# Altium PCB 控制板.PcbDoc (part 1 of 2)
Units mil, origin at the board's own origin, x right, y up, seen from the top; angles counter-clockwise.
Board outline 5565.03 x 4140.03 mil, 2 copper layers (Top Layer, Bottom Layer); 115 components, 113 nets, 543 pads, 215 vias.
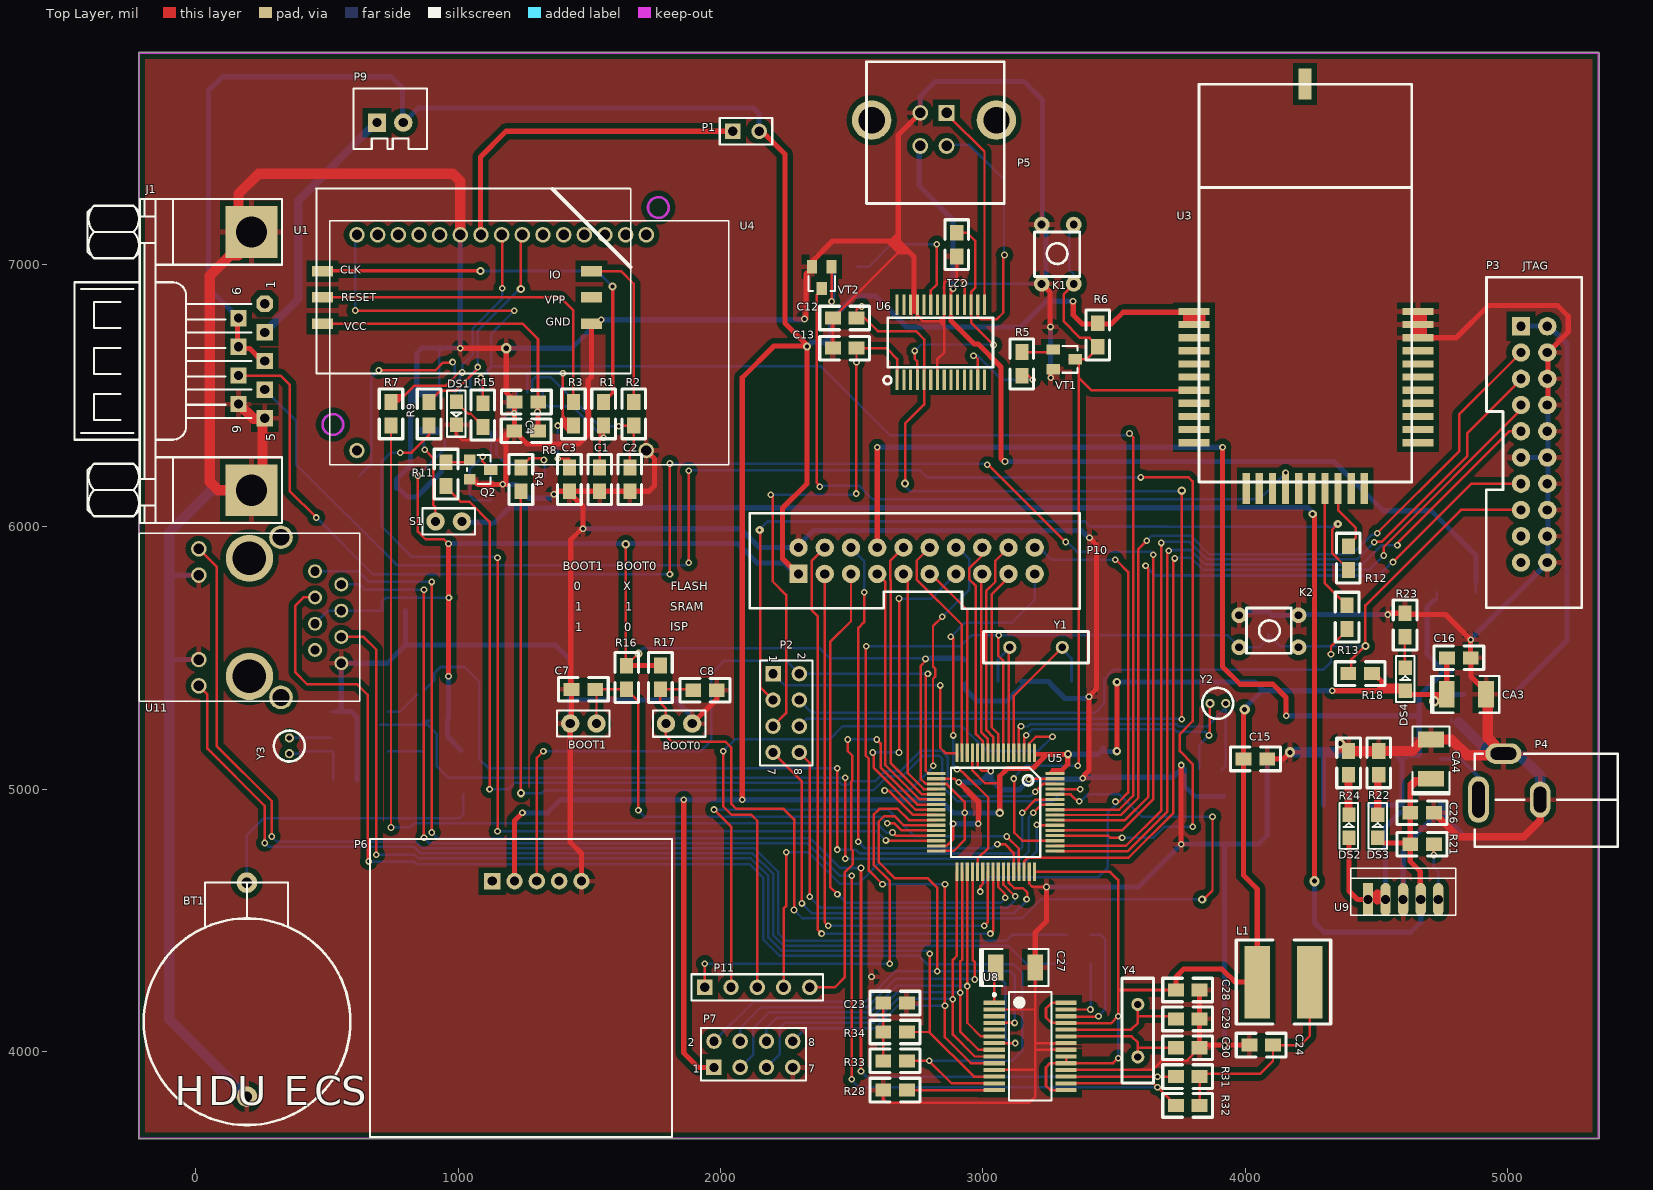
[diagram p0: Top Layer view]
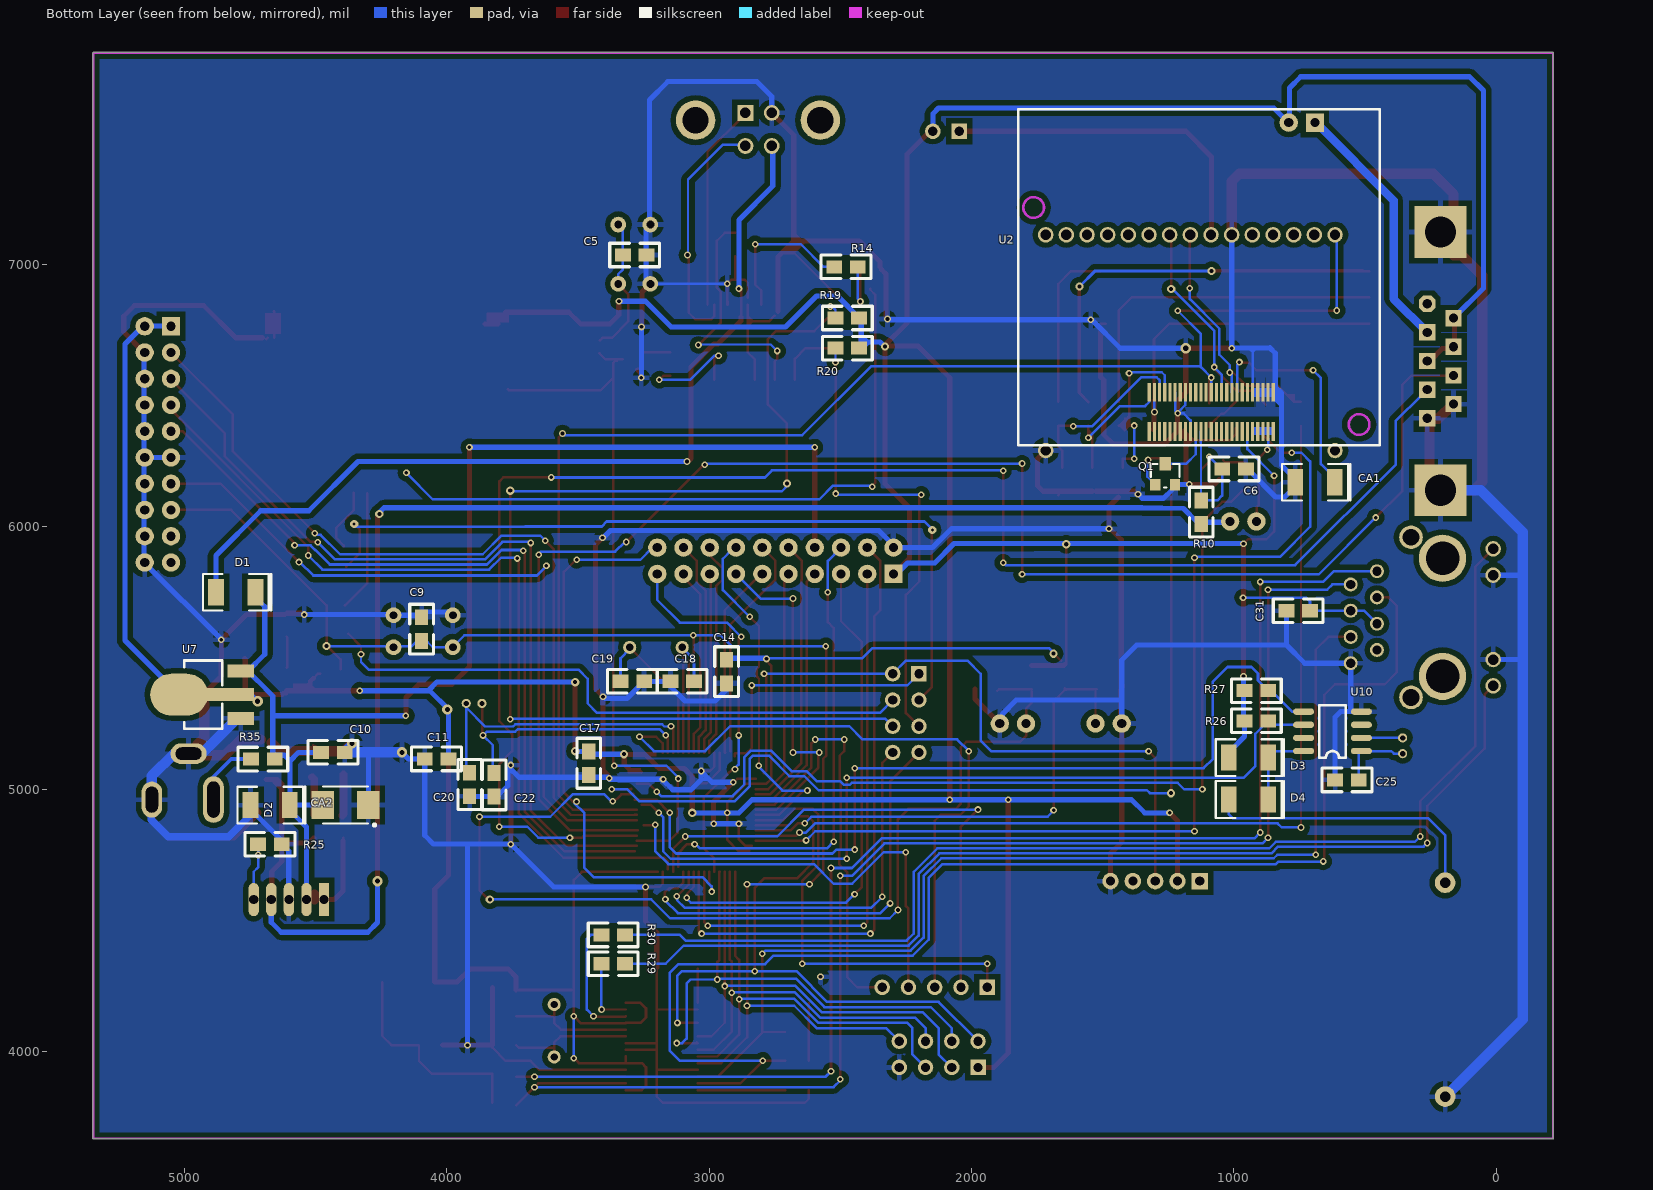
[diagram p1: Bottom Layer view, seen from below]

## Layer stack, top to bottom
Top Layer: signal copper 1.4
Dielectric: dielectric 12.6, FR-4, Dk 4.8
Bottom Layer: signal copper 1.4

## Board outline
-215,3667.48 cw(c-215,3670) -217.51,3670 -217.51,7805 cw(c-215,7805) -215,7807.52 5345,7807.52 cw(c5345,7805) 5347.52,7805 5347.52,3670 cw(c5345,3670) 5345,3667.48

## Design rules (kind name [scope] priority, off if disabled: settings)
Clearance Clearance_4 [InNet('GND0','U','V','W','R','S','T')] p1: gap=98.43
Clearance Clearance_3 [(InPolygon)] p2: gap=20
Clearance Clearance_2 [(InPadClass('All Pads') AND InComponent('U2','U5'))] p3: gap=7.87
Clearance Clearance_1 [InNet('SIM-GND','VCC','VDD3_3','VDD4')] p4: gap=10
Clearance [All] p5: gap=9.45
ComponentClearance [All] p1: gap=0 collisioncheckmode=3 verticalgap=0 showdistances=FALSE
FabricationTestPointUsage TestPointUsage [All] p1: valid=0 allowmultiple=FALSE
FabricationTestpoint Testpoint [All] p1: side=3 testpointundercomponent=TRUE minsize=40 maxsize=100 preferedsize=60 minholesize=0 maxholesize=40 preferedholesize=32 testpointgrid=1 allowsidetop=TRUE allowsidebottom=TRUE usegrid=TRUE gridtolerance=0.01
Height [All] p1: minheight=0 maxheight=2362.2 prefheight=500
HoleSize [All] p1: absolutevalues=TRUE maxlimit=314.96 minlimit=1 maxpercent=80.000 minpercent=20.000
HoleToHoleClearance [All] p1: gap=0 allowstackedmicrovias=TRUE
MinimumSolderMaskSliver [All] p1: minsoldermaskwidth=0
PolygonConnect PolygonConnect_1 [InNet('GND0')] p1: connectstyle=Relief reliefconductorwidth=78.74 reliefentries=4 polygonreliefangle="90 Angle"
PolygonConnect [InNet('GND')] p2: connectstyle=Relief reliefconductorwidth=19.68 reliefentries=4 polygonreliefangle="90 Angle"
RoutingVias [All] p1: holewidth=13.78 width=25.59 viastyle="Through Hole" minholewidth=11.81 minwidth=23.62 maxholewidth=157.48 maxwidth=393.7
SilkToSilkClearance [All] p1: silktosilkclearance=0
SilkscreenOverComponentPads [All] p1: minsilkscreentomaskgap=0
SolderMaskExpansion [All] p1: expansion=4
Width [All] p1: maxlimit=157.48 minlimit=9.45 preferedwidth=19.68
19 further rules are at their usual default settings.

## Components (designator, comment, footprint, x,y, rotation, side; value= is the part's Value field where it differs from the comment)
BOOT0 "SW-SPST" HEAD1*2 1892,5250 r180 top (schematic designator BOOT2)
BOOT1 "SW-SPST" HEAD1*2 1427.34,5250.54 r0 top
BT1 "3.6V" BT 195,4115 r0 top
C1 "33pF" C0805 1539.34,6235.54 r90 top
C2 "33pF" C0805 1654.34,6235.54 r90 top
C3 "33pF" C0805 1424.34,6235.54 r90 top
C4 "104" C0805 1315,6475 r0 top
C5 "0.1u" C0805 3338.04,7035.54 r0 bottom
C6 "104" C0805 1054.34,6220.54 r0 bottom
C7 "104" C0805 1532.34,5380.54 r0 top
C8 "104" C0805 1886,5377 r180 top
C9 "104" C0805 4095,5555 r270 bottom
C10 "104" C0805 4378,5140.54 r180 bottom
C11 "104" C0805 4093,5115.54 r0 bottom
C12 "101" C0805 2528.04,6795.54 r0 top
C13 "101" C0805 2528.04,6680.54 r0 top
C14 "104" C0805 2933,5393 r270 bottom
C15 "104" C0805 4093,5115.54 r0 top
C16 "104" C0805 4868,5500.54 r0 top
C17 "104" C0805 3458,5044 r270 bottom
C18 "Cap" C0805 3157.04,5411.54 r0 bottom
C19 "Cap" C0805 3347.04,5411.54 r0 bottom
C20 "Cap" C0805 3912,5073 r90 bottom
C21 "104" C0805 2900,7020 r270 top
C22 "Cap" C0805 3819,5072 r90 bottom
C23 "Cap Semi" C0805 2610,4185 r180 top
C24 "Cap Semi" C0805 4115,4025 r0 top
C25 "Cap Var" C0805 514.34,5035.54 r180 bottom
C26 "104" C0805 4728,4910.54 r0 top
C27 "Cap Pol3" 1210C 3050,4320 r0 top
C28 "Cap Semi" C0805 3835,4235 r0 top
C29 "Cap Semi" C0805 3835,4125 r0 top
C30 "Cap Semi" C0805 3835,4015 r0 top
C31 "Cap Semi" C0805 810,5680 r0 bottom
CA1 "220uf" 1210C 617,6170.54 r0 bottom
CA2 "10UF/16V" 1210C 4598,4940.54 r0 bottom
CA3 "4.7UF/16V" 1210C 4768,5360.54 r0 top
CA4 "10uf" 1210C 4708,5040.54 r90 top
D1 "IN4001" 1210D 4873,5750.54 r180 bottom
D2 "Diode 1N4007" 1SMB5913BT3-齐纳稳压二极管 4385,4940 r0 bottom
D3 "1N4001" 1210D 1014.34,5120.54 r180 bottom
D4 "1N4001" 1210D 1014.34,4960.54 r180 bottom
DS1 "LPG" LED0805 994.34,6475.54 r270 top
DS2 "VCC" LED0805 4393,4815.54 r90 top
DS3 "VCC4" LED0805 4503,4815.54 r90 top
DS4 "VCC3V3" LED0805 4608,5375.54 r90 top
J1 "D Connecter 9" "UART - Male" 53.75,6631.61 r90 top
K1 "KEY" KEY-DIP 3283.04,7040.54 r90 top
K2 "KEY" KEY-DIP 4091,5603.68 r0 top
L1 "Inductor" L0725 4145,4265 r180 top
P1 "Header 2" HDR1X2 2047,7507 r0 top
P2 "Header 4X2" HDR2X4 2200,5440 r270 top
P3 "Header 10X2" IDC-20 5050,6765 r270 top
P4 "DC-005" DC-005 5418,4780.54 r180 top
P5 "USB" USB-B-180d 2861,7576.98 r270 top
P6 "LR9548S" GPS-VK-162 1130,4650 r0 top
P7 "Header 4X2" HDR2X4 1975,3940 r0 top
P9 "Header 2" SIP-2B 691,7540 r0 top
P10 "Header 10X2" IDC-20 2296.04,5820.54 r0 top
P11 "Header 5" HDR1X5 1940,4245 r0 top
Q1 "2N3904" NPN-SOT23 1224.34,6160.54 r180 bottom
Q2 "2N3904" NPN-SOT23 1044.34,6180.54 r270 top
R1 "33" R0805 1554.34,6375.54 r270 top
R2 "33" R0805 1669.34,6375.54 r270 top
R3 "33" R0805 1439.34,6375.54 r270 top
R4 "Res2" R0805 1239.34,6125.54 r270 top
R5 "1K" R0805 3148.04,6565.54 r270 top
R6 "Res2" R0805 3437,6785.54 r90 top
R7 "22Ω" R0805 744.34,6485.54 r90 top
R8 "15k" C0805 1314.34,6365.54 r0 top
R9 "22Ω" R0805 889.34,6485.54 r90 top
R10 "Res2" R0805 1124.34,6000.54 r270 bottom
R11 "Res2" R0805 954.34,6145.54 r270 top
R12 "22ohm" R0805 4392,5935.54 r90 top
R13 "22ohm" R0805 4387,5710.54 r90 top
R14 "1K" R0805 2533.04,6990.54 r0 bottom
R15 "1K" R0805 1094.34,6480.54 r90 top
R16 "Res2" R0805 1642.34,5480.54 r90 top
R17 "Res2" R0805 1771,5481 r90 top
R18 "10k" R0805 4382,5440.54 r180 top
R19 "3.3k" R0805 2528.04,6795.54 r0 bottom
R20 "3.3k" R0805 2528.04,6680.54 r0 bottom
R21 "220K" R0805 4618,4790.54 r180 top
R22 "1K" R0805 4508,5045.54 r270 top
R23 "1K" R0805 4608,5570.54 r270 top
R24 "Res2" R0805 4393,5045.54 r270 top
R25 "100K" R0805 4728,4790.54 r0 bottom
R26 "Res2" R0805 859.34,5260.54 r180 bottom
R27 "Res2" R0805 859.34,5375.54 r180 bottom
R28 "Res Semi" R0805 2720,3853.66 r0 top
R29 "Res Semi" R0805 3310,4335 r180 bottom
R30 "Res Semi" R0805 3310,4445 r180 bottom
R31 "Res Semi" R0805 3725,3905 r180 top
R32 "Res Semi" R0805 3725,3795 r180 top
R33 "Res Semi" R0805 2720,3965 r0 top
R34 "Res Semi" R0805 2720,4075 r0 top
R35 "Res Semi" r0805 4755,5115 r0 bottom
S1 "SW-SPST" HEAD1*2 914.34,6020.54 r0 top
U1 "SIMCARD" SIMCARD 1074.34,6945.54 r270 top
U2 "EM310" EM310 1194.34,6855.54 r90 bottom
U3 "STM32W108-3" STM32W108-3 4633,6170.54 r90 top
U4 "EMW3280" EMW-3280 614.64,6290.54 r0 top
U5 "STM32" LQFP64 3195.78,5138.29 r270 top
U6 "FT232R" SSOP-28 2673.04,6560.54 r90 top
U7 "AS1117-3.3V" SOT-223 5018,5360.54 r90 bottom
U8 "ENC28J60" ENC28J60-ss 3180,4020 r0 top
U9 "MIC29302" TO220-5 4468,4580.54 r90 top
U10 "PCF8563" SO-8 514.34,5145.54 r0 bottom
U11 "HR911105A-RJ45" HR911105A 205,5655 r90 top
VT1 "2N3904" SOT23-3 3268.04,6675.54 r270 top
VT2 "2N3904" SOT23-3 2423.04,6990.54 r180 top
Y1 "8MHZ" XTAL 3102.04,5540.54 r0 top
Y2 "32.768KHZ" XTAL2 3925,5329 r0 top
Y3 "32.768KHZ" XTAL2 355,5195.54 r90 top
Y4 "25M" xtal 3590,4180 r270 top

## Footprints (in the part's own frame and the unit in brackets; to place one, negate y for a bottom-side part, rotate by r counter-clockwise, add the part's x,y. Pads: shape width x height; smd on the part's side, far side on the other; paste and mask are expansions set on the pad)
1SMB5913BT3-齐纳稳压二极管 [mil] "Molded Diode, 2-Leads, Body 4.3x3.6mm, IPC Medium Density"
  rect 85x107.99 smd: 1(-87.01,0) 2(87.01,0)
  silkscreen extent -116,-70 85,81, body extent -90,-75 90,75, height 95
1210C [mil]
  rect 60x100 smd: 1(-1,1) 2(149,1)
  silkscreen extent -61,-69 199,71
1210D [mil]
  rect 60x100 smd: 1(-5,0.06) 2(145,0.06)
  silkscreen extent -55,-70 205,70
BT [mm]
  round 2 hole 1: 1(0,13.431) 2(0,-7.269)
  silkscreen extent -9.97,-10.02 10.03,13.46
C0805 [mil]
  rect 60x50 smd: 1(-100,0) 2(-10,0)
  silkscreen extent -150,-45 40,45
DC-005 [mm] "¼ä¾"
  oval 3.5x2 hole 1.2 slot 2.5 at 0 deg: 1(11.049,-9.017)
  oval 2x3.5 hole 1.2 slot 2.5 at 90 deg: 2(7.493,-4.572)
  oval 2x4.5 hole 1.2 slot 3.5 at 90 deg: 3(13.462,-4.572)
  silkscreen extent 0,-9.02 13.84,0
EM310 [mm]
  rect 1.8x0.3 smd: 1(-8.712,3.254) 2(-8.712,2.754) 3(-8.712,2.254) 4(-8.712,1.754) 5(-8.712,1.254) 6(-8.712,0.754) 7(-8.712,0.254) 8(-8.712,-0.246) 9(-8.712,-0.746) 10(-8.712,-1.246) 11(-8.712,-1.746) 12(-8.712,-2.246) 13(-8.712,-2.746) 14(-8.712,-3.246) 15(-8.712,-3.746) 16(-8.712,-4.246) 17(-8.712,-4.746) 18(-8.712,-5.246) 19(-8.712,-5.746) 20(-8.712,-6.246) 21(-8.712,-6.746) 22(-8.712,-7.246) 23(-8.712,-7.746) 24(-8.712,-8.246) 25(-8.712,-8.746) 26(-12.512,-8.746) 27(-12.512,-8.246) 28(-12.512,-7.746) 29(-12.512,-7.246) 30(-12.512,-6.746) 31(-12.512,-6.246) 32(-12.512,-5.746) 33(-12.512,-5.246) 34(-12.512,-4.746) 35(-12.512,-4.246) 36(-12.512,-3.746) 37(-12.512,-3.246) 38(-12.512,-2.746) 39(-12.512,-2.246) 40(-12.512,-1.746) 41(-12.512,-1.246) 42(-12.512,-0.746) 43(-12.512,-0.246) 44(-12.512,0.254) 45(-12.512,0.754) 46(-12.512,1.254) 47(-12.512,1.754) 48(-12.512,2.254) 49(-12.512,2.754) 50(-12.512,3.254)
  Keep-Out Layer circle w0.254: c9.168,14.444 r1
  Keep-Out Layer circle w0.254: c-11.832,-17.056 r1
  silkscreen extent -13.83,-19.06 18.67,15.94
EMW-3280 [mm]
  round 1.5 hole 1: 1(0,0) 15(28,0) 16(28,20.88) 17(26,20.88) 18(24,20.88) 19(22,20.88) 20(20,20.88) 21(18,20.88) 22(16,20.88) 23(14,20.88) 24(12,20.88) 25(10,20.88) 26(8,20.88) 27(6,20.88) 28(4,20.88) 29(2,20.88) 30(0,20.88)
  silkscreen extent -2.62,-1.4 35.98,22.25
ENC28J60-ss [mm] "SOP, 28-Leads, Body 10.5x5.6mm (max), Pitch 0.65mm, IPC Medium Density"
  rect 2.05x0.4 smd: 1(-3.475,4.225) 2(-3.475,3.575) 3(-3.475,2.925) 4(-3.475,2.275) 5(-3.475,1.625) 6(-3.475,0.975) 7(-3.475,0.325) 8(-3.475,-0.325) 9(-3.475,-0.975) 10(-3.475,-1.625) 11(-3.475,-2.275) 12(-3.475,-2.925) 13(-3.475,-3.575) 14(-3.475,-4.225) 15(3.475,-4.225) 16(3.475,-3.575) 17(3.475,-2.925) 18(3.475,-2.275) 19(3.475,-1.625) 20(3.475,-0.975) 21(3.475,-0.325) 22(3.475,0.325) 23(3.475,0.975) 24(3.475,1.625) 25(3.475,2.275) 26(3.475,2.925) 27(3.475,3.575) 28(3.475,4.225)
  silkscreen extent -3.6,-5.25 2.05,5.25, body extent -2.8,-5.25 2.8,5.25, height 2
GPS-VK-162 [mm]
  rect 1.6x1.6 hole 0.889: 1(0,0)
  round 1.6 hole 0.889: 2(2.159,0) 3(4.318,0) 4(6.477,0) 5(8.636,0)
  silkscreen extent -11.81,-24.77 17.4,4.06
HDR1X2 [mm] "Connector; Header; 2 Position"
  rect 1.5x1.5 hole 0.9: 1(0,0)
  round 1.5 hole 0.9: 2(2.54,0)
  silkscreen extent -1.27,-1.27 3.81,1.27
HDR1X5 [mm] "Connector; Header; 5 Position"
  rect 1.5x1.5 hole 0.9: 1(0,0)
  round 1.5 hole 0.9: 2(2.54,0) 3(5.08,0) 4(7.62,0) 5(10.16,0)
  silkscreen extent -1.27,-1.27 11.43,1.27
HDR2X4 [mm] "Connector; Header; 4x2 Position"
  rect 1.5x1.5 hole 0.9: 1(0,0)
  round 1.5 hole 0.9: 2(0,2.54) 3(2.54,0) 4(2.54,2.54) 5(5.08,0) 6(5.08,2.54) 7(7.62,0) 8(7.62,2.54)
  silkscreen extent -1.27,-1.27 8.89,3.81
HEAD1*2 [mil]
  round 70 hole 35: 1(0,0) 2(100,0)
  silkscreen extent -50,-50 150,50
HR911105A [mm]
  round 1.35 hole 0.89: 1(4.46,-6.35) 2(3.18,-8.89) 3(1.92,-6.35) 4(0.64,-8.89) 5(-0.62,-6.35) 6(-1.9,-8.89) 7(-3.16,-6.35) 8(-4.44,-8.89)
  round 1.5 hole 1.02: 9(6.625,4.9) 10(4.085,4.9) 11(-4.085,4.9) 12(-6.625,4.9)
  round 2.286 hole 1.63: ""(-7.745,-3.05) ""(7.745,-3.05)
  round 4.572 hole 3.25: ""(-5.715,0) ""(5.715,0)
  silkscreen extent -8.13,-10.67 8.13,10.67
IDC-20 [mil]
  rect 70x70 hole 35: 1(1,0)
  round 70 hole 35: 2(1,100) 3(101,0) 4(101,100) 5(201,0) 6(201,100) 7(301,0) 8(301,100) 9(401,0) 10(401,100) 11(501,0) 12(501,100) 13(601,0) 14(601,100) 15(701,0) 16(701,100) 17(801,0) 18(801,100) 19(901,0) 20(901,100)
  silkscreen extent -185,-133 1073,231
KEY-DIP [mil]
  round 60 hole 30: 1(-115,59.45) 2(-115,-62.6) 3(111,-62.6) 4(111,59.45)
  silkscreen extent -87,-86 83,87
L0725 [mm]
  rect 2.5x7 smd: 1(2.54,0) 2(-2.54,0)
  silkscreen extent -4.57,-4.06 4.57,4.06
LED0805 [mm]
  rect 1.4x1.27 smd: 1(0,-0.025) 2(2.21,-0.025)
  silkscreen extent -1.1,-0.91 3.37,0.86
LQFP64 [mm]
  oval 1.8x0.3 smd: 1(0,0)
  rect 1.8x0.3 smd: 2(0,-0.5) 3(0,-1) 4(0,-1.5) 5(0,-2) 6(0,-2.5) 7(0,-3) 8(0,-3.5) 9(0,-4) 10(0,-4.5) 11(0,-5) 12(0,-5.5) 13(0,-6) 14(0,-6.5) 15(0,-7) 16(0,-7.5) 33(11.5,-7.5) 34(11.5,-7) 35(11.5,-6.5) 36(11.5,-6) 37(11.5,-5.5) 38(11.5,-5) 39(11.5,-4.5) 40(11.5,-4) 41(11.5,-3.5) 42(11.5,-3) 43(11.5,-2.5) 44(11.5,-2) 45(11.5,-1.5) 46(11.5,-1) 47(11.5,-0.5) 48(11.5,0)
  rect 0.3x1.8 smd: 17(2,-9.5) 18(2.5,-9.5) 19(3,-9.5) 20(3.5,-9.5) 21(4,-9.5) 22(4.5,-9.5) 23(5,-9.5) 24(5.5,-9.5) 25(6,-9.5) 26(6.5,-9.5) 27(7,-9.5) 28(7.5,-9.5) 29(8,-9.5) 30(8.5,-9.5) 31(9,-9.5) 32(9.5,-9.5) 49(9.5,2) 50(9,2) 51(8.5,2) 52(8,2) 53(7.5,2) 54(7,2) 55(6.5,2) 56(6,2) 57(5.5,2) 58(5,2) 59(4.5,2) 60(4,2) 61(3.5,2) 62(3,2) 63(2.5,2) 64(2,2)
  silkscreen extent 1.43,-8.07 10.07,0.56
NPN-SOT23 [mm]
  rect 1x1.1 smd: 1(0,0) 2(-1.905,0)
  rect 1.1x1.3 smd: 3(-0.952,2.032)
  silkscreen extent -2.35,-0.28 0.44,2.01
R0805 [mil]
  rect 60x50 smd: 1(-100,0) 2(-10,0)
  silkscreen extent -150,-45 40,45
r0805 [mil]
  rect 60x50 smd: 1(-100,0) 2(-10,0)
  silkscreen extent -150,-45 40,45
SIMCARD [mil]
  rect 40x80 smd: 1(171.63,-590.25) 2(71.63,-590.25) 3(-28.37,-590.25) 4(171.63,433.37) 5(71.63,433.37) 6(-28.37,433.37)
  silkscreen extent -344,-615 361,583
SIP-2B [mil]
  rect 70x70 hole 35: 1(0,0)
  round 70 hole 35: 2(100,0)
  silkscreen extent -90,-100 190,130
SO-8 [mil]
  oval 80x24 smd: 1(0,0) 2(0,-50) 3(0,-100) 4(0,-150) 5(220,-150) 6(220,-100) 7(220,-50) 8(220,0)
  silkscreen extent 60,-175 160,25
SOT23-3 [mm]
  rect 1x1.3 smd: 1(0,0) 2(1.9,0) 3(0.95,2.1)
  silkscreen extent -0.35,0.87 2.25,2.35
SOT-223 [mil]
  rect 50x100 smd: 1(-90.5,-234) 3(90.5,-234)
  rect 50x200 smd: 2(0,-184)
  oval 160x220 smd: 2(0,1)
  silkscreen extent -130,-164 130,-19
SSOP-28 [mm]
  rect 2x0.3 smd: 1(0,0) 2(0,-0.65) 3(0,-1.3) 4(0,-1.95) 5(0,-2.6) 6(0,-3.25) 7(0,-3.9) 8(0,-4.55) 9(0,-5.2) 10(0,-5.85) 11(0,-6.5) 12(0,-7.15) 13(0,-7.8) 14(0,-8.45) 15(7.239,-8.45) 16(7.239,-7.8) 17(7.239,-7.15) 18(7.239,-6.5) 19(7.239,-5.85) 20(7.239,-5.2) 21(7.239,-4.55) 22(7.239,-3.9) 23(7.239,-3.25) 24(7.239,-2.6) 25(7.239,-1.95) 26(7.239,-1.3) 27(7.239,-0.65) 28(7.239,0)
  silkscreen extent -0.43,-9.27 5.99,1.32
STM32W108-3 [mm]
  rect 0.7x3 smd: 1(16.51,21.074) 2(15.24,21.074) 3(13.97,21.074) 4(12.7,21.074) 5(11.43,21.074) 6(10.16,21.074) 7(8.89,21.074) 8(7.62,21.074) 9(6.35,21.074) 10(5.08,21.074) 11(3.81,21.074) 22(3.81,-0.627) 23(5.08,-0.627) 24(6.35,-0.627) 25(7.62,-0.627) 26(8.89,-0.627) 27(10.16,-0.627) 28(11.43,-0.627) 29(12.7,-0.627) 30(13.97,-0.627) 31(15.24,-0.627) 32(16.51,-0.627)
  rect 3x0.7 smd: 12(-0.627,16.002) 13(-0.627,14.732) 14(-0.627,13.462) 15(-0.627,12.192) 16(-0.627,10.922) 17(-0.627,9.652) 18(-0.627,8.382) 19(-0.627,7.112) 20(-0.627,5.842) 21(-0.627,4.572)
  rect 3x1.3 smd: ""(38.5,10.314)
  silkscreen extent 0,0 38.5,20.57
TO220-5 [mil] "可"
  rect 126.67x39.17 hole 35: 1(-0.86,1)
  oval 126.67x39.17 hole 35: 2(-0.86,-65.93) 3(-0.86,-132.86) 4(-0.86,-199.79) 5(-0.86,-266.72)
  silkscreen extent -61,-333 119,67
"UART - Male" [mil]
  oct 62x62 hole 35: 1(218.39,-209.25)
  rect 62x62 hole 35: 2(109.22,-209.25) 3(0.05,-209.25) 4(-109.11,-209.25) 5(-218.28,-209.25) 6(163.39,-109.25) 7(54.22,-109.25) 8(-54.95,-109.25) 9(-164.11,-109.25)
  rect 196.67x196.67 hole 118.33: 10(-492.45,-159.25) 11(491.72,-159.25)
  silkscreen extent -617,-276 617,516
USB-B-180d [mil] "180度"
  round 60.06 hole 40: 1(125.98,-100) 2(125.98,0) 4(0,-100)
  rect 60.06x60.06 hole 40: 3(0,0)
  round 150 hole 100: 5(27.56,-285) 6(27.56,190)
  silkscreen extent -195,-305 345,220
XTAL [mil]
  round 50 hole 28: 1(0,0) 2(200,0)
  silkscreen extent -100,-60 300,60
xtal [mil]
  round 50 hole 28: 1(0,0) 2(200,0)
  silkscreen extent -100,-60 300,60
XTAL2 [mil]
  round 35 hole 20: 1(0,-2) 2(-60,-2)
  silkscreen extent -90,-61 28,57

## Part data
BOOT0 BOOT1 S1: "Single-Pole, Single-Throw Switch"
BT1: library part Battery, "Multicell Battery"
C1 C2 C3 C4: library part Cap
C5 C6 C7 C8 C9 C12 C13: library part Cap, "Capacitor"
C10 C11: library part C
C14 C15 C16 C17: library part CAP, "Capacitor"
C18 C19 C20 C22: "Capacitor"
C21 C26: library part C, "C"
C23 C24 C28 C29 C30 C31: "Capacitor (Semiconductor SIM Model)"
C25: "Variable or Adjustable Capacitor"
C27: "Polarized Capacitor (Surface Mount)"
CA1 CA4: library part Cap2
CA2 CA3: library part ECAP
D1: library part DIODE, "Diode"
D2: "1 Amp General Purpose Rectifier"
D3 D4: library part "Diode 1N4001", "1 Amp General Purpose Rectifier"
DS1 DS3 DS4: library part LED3, "Typical BLUE SiC LED"
DS2: library part LED
J1: library part UART-male, "9针串口，插针型，公头"
P1 P9: "Header, 2-Pin"
P2 P7: "Header, 4-Pin, Dual row"
P3 P10: "Header, 10-Pin, Dual row"
P4: library part "Header 3", "Header, 3-Pin"
P6: library part "Header 5", "Header, 5-Pin"
P11: "Header, 5-Pin"
Q1 Q2: "NPN General Purpose Amplifier"
R1 R2 R3 R5 R7 R9 R12 R13 R14 R15 R21 R22 R23 R25: library part RES, "R"
R4 R6 R10 R11 R16 R17 R24 R26 R27: "Resistor"
R8: library part Res2
R18 R19 R20: library part Res3, "Resistor"
R28 R29 R30 R31 R32 R33 R34 R35: "Semiconductor Resistor"
U1: library part SIM
U2: "GSM"
U5: library part STM32F103RE
U7: library part AS1117
VT1 VT2: library part NPN, "NPN Transistor"
Y1 Y2 Y3 Y4: library part XTAL, "Crystal Oscillator"

## Via types
v1: diameter 25.59, hole 13.78, Top Layer to Bottom Layer, 190 vias
v2: diameter 31.5, hole 15.75, Top Layer to Bottom Layer, 16 vias
v3: diameter 39.37, hole 19.68, Top Layer to Bottom Layer, 6 vias
v4: diameter 31.5, hole 11.81, Top Layer to Bottom Layer, 2 vias
v5: diameter 25.59/25.59 (per signal layer), hole 13.78, Top Layer to Bottom Layer, 1 vias

## Nets (pads, with @x,y where several pads share a name; then routed paths per layer and width w, separated by ;. In a path a pad name is that pad's centre, name@x,y a point inside that pad or via, vN(x,y) a via of type N, cw(c..) or ccw(c..) an arc to the next point about the centre after c; other vN are vias at no path point)
/RESET_108: C5.2 K1.2 K1.3 R6.1 U3.7 U5.51 VT1.3 | length 3218.9
  Top Layer w9.45: v1@3119.52,5038.54 3119.52,4834.06 3149.93,4803.65 U5.51@3274.52,4803.65 ; VT1.3@3329.04,6638.13 VT1.3@3350.72,6638.13 ; VT1.3@3357.04,6632.54 3364.04,6625.54 3364.04,6569.54 ; v1@3364.04,5097.54 3365.45,5098.94 3365.45,6567.13 3364.04,6568.54
  Top Layer w10: K1.2@3337.04,6915.54 3307,6885.5 3307,6783.54 3370.52,6720.02 3406.52,6720.02 R6.1@3416,6710.54 ; VT1.3@3350.72,6632.54 VT1.3@3350.72,6638.13 3394.6,6638.13 R6.1@3417,6660.54 ; 3366.04,6566.54 3412.04,6520.54 3762,6520.54 U3.7@3766,6524.54
  Bottom Layer w9.45: v1@3121,5034.54 3121,5048.54 3162,5089.54 v1@3351.04,5089.54 ; K1.2@3345.64,6925.54 3345.64,6962.94 3328.04,6980.54 C5.2@3328.04,7035.54 3328.04,7133.94 K1.3@3345.64,7151.54
  other v1: 3117,5040.54 3361.04,5089.54
/RST: C6.2 Q2.3 R10.1 U2.40 | length 557
  Top Layer w9.45: v1@1092,6260.54 1092,6250.37 Q2.3@1124.34,6218.04
  Bottom Layer w9.45: v1@1091,6264.54 1044.34,6217.87 C6.2@1044.34,6220.54 1045,6219.87 1045,6118.54 1063,6100.54 R10.1@1124.34,6100.54 ; 1125.34,6319.54 1125.34,6123.54 R10.1@1128.34,6120.54 ; 1125.58,6319.78 U2.40@1125.58,6362.93
  other v1: 1094,6266.54
BOOT0: BOOT0.2 C8.2 R17.1 U5.60 | length 4011.6
  Top Layer w9.45: R17.1@1770,5372 1770,5330 1792,5308 1792,5203 1815,5180 2020,5180 2040,5160 2040,4945 2060,4925 2240,4925 2280,4885 v1(2280,4540) v1@2275,4545 ; R17.1@1771,5381 1896,5381 C8.2@1901,5376 ; U5.60@3288.04,4981.99 3289.5,4980.54 3334,4980.54 3367,4947.54 v1@3370,4947.54 ; v2(3835,4580) 3840,4580 3874.45,4614.45 v1(3874.45,4895) v1@3874.45,4897.98
  Bottom Layer w9.45: v1(2280,4540) 2311.46,4508.54 3148.54,4508.54 3220,4580 v2(3835,4580) ; v1@3366,4949.54 3368,4949.54 3400,4981.54 3518.46,4981.54 3605,4895 v1(3874.45,4895) ; v1@3874.45,4885 v1(3874.45,4895) ; v1@3874.45,4899.98 v1(3874.45,4895)
  other v1: 3367,4954.54
BOOT1: BOOT1.2 C7.2 R16.1 U5.28 | length 1899.3
  Top Layer w9.45: C7.2@1522.34,5380.54 C7.2@1525.34,5380.54 ; BOOT1.2@1527.34,5250.54 1527.34,5378.54 C7.2@1525.34,5380.54 ; R16.1@1638.34,5379.54 1637.34,5380.54 C7.2@1525.34,5380.54 ; R16.1@1644.34,5384.54 1644.34,5377.54 1687,5334.87 v1(1687,4920) ; v1(2635,4870) 2662.5,4870 2689.24,4843.25 2703.75,4843.25 2703.98,4843.02 U5.28@2821.76,4843.02
  Bottom Layer w9.45: v1@1685,4920 v1(1687,4920) 1687,4918 1710,4895 2610,4895 v1(2635,4870)
CBUS0: R14.2 U6.23 | length 577.2
  Top Layer w9.45: U6.23@2800.99,6845.54 2800.99,6900.54 2824.04,6923.58 v1(2824.04,7076.54)
  Bottom Layer w9.45: R14.2@2523.04,6990.54 2564.04,6990.54 2650.04,7076.54 v1(2824.04,7076.54)
CBUS2: R5.2 U6.13 | length 410.6
  Top Layer w9.45: v1@2968.04,6651.96 2968.04,6650.96 2980.13,6638.87 U6.13@2980.13,6560.54 ; R5.2@3148.04,6575.54 3174.04,6575.54 v1(3189.04,6560.54)
  Bottom Layer w9.45: v1@2963,6651 2980.57,6651 3072.04,6559.54 v1@3192.04,6559.54
  other v1: 2964,6652
ENC-INT: P7.2 U5.27 U8.4 | length 2494.9
  Top Layer w9.45: U5.27@2821.76,4862.7 2697.3,4862.7 2662.48,4897.52 2623.6,4897.52 2602.8,4876.71 2602.8,4722.2 2665,4660 2790,4660 2825.91,4624.09 v1@2825.91,4311.97 ; U8.4@3043.19,4109.57 v1(3120.43,4109.57)
  Bottom Layer w9.45: P7.2@1975,4040 2125,4190 2550,4190 2666.97,4306.97 v1(2825.91,4306.97) ; v1@2825.91,4311.97 2830.91,4306.97 3103.03,4306.97 3120.43,4289.57 v1(3120.43,4109.57)
GND: BOOT0.1 BOOT1.1 BT1.2 C1.1 C2.1 C3.1 C4.1 C5.1 C6.1 C7.1 C8.1 C9.1 C10.2 C11.2 C12.1 C13.1 C14.2 C15.2 C16.2 C17.2 C18.2 C19.1 C20.1 C21.2 C22.1 C23.1 C24.1 C25.1 C26.2 C27.2 C28.2 C29.2 C30.2 C31.2 CA1.2 CA2.2 CA3.2 CA4.2 D2.1 DS1.2 J1.5 J1.9 J1.10 J1.11 K1.1 K1.4 K2.1 K2.4 P3.4 P3.6 P3.8 P3.10 P3.11 P3.12 P3.14 P3.16 P3.18 P3.20 P4.1 P4.2 P5.4 P6.5 P7.7 P10.2 Q1.1 Q2.1 R8.1 R22.1 R23.1 R24.1 R25.1 R28.1 U1.4 U2.6 U2.8 U2.21 U2.22 U2.23 U2.24 U2.25 U2.42 U3.30 U3.31 U3.32 U4.15 U4.25 U5.12 U5.18 U5.31 U5.47 U5.63 U6.7 U6.18 U6.21 U6.25 U6.26 U7.1 U8.2 U8.11 U8.18 U8.21 U8.22 U9.3 U10.4 U11.8 U11.10 U11.11 VT1.2 VT2.2 | length 37822.5
  Top Layer w9.45: DS1.2@993.34,6375.54 993.34,6351.54 1015.34,6329.54 1152.34,6329.54 R8.1@1191.84,6369.04 ; C4.1@1214.34,6466.54 C4.1@1214.34,6480.54 ; C7.1@1427.34,5374.54 1429.34,5376.54 1429.34,5383.54 C7.1@1429.34,5390.54 ; U1.4@1487.34,6773.91 U1.4@1507.71,6773.91 1508.34,6773.91 U1.4@1508.34,6759.54 ; C1.1@1524.34,6135.54 C1.1@1539.34,6135.54 ; C2.1@1654.34,6135.54 C2.1@1669.84,6120.04 ; C13.1@2428.04,6680.54 C12.1@2428.04,6795.54 ; C12.1@2443.52,6810.02 2429.04,6795.54 C12.1@2428.04,6795.54 ; R28.1@2620,3853.66 2620,3820 2635,3805 3175,3805 3199,3829 3199,3930.43 ; 2675,7107 2675,7042.5 C12.1@2428.04,6795.54 ; 2749.81,6804.76 2772.04,6782.54 2832.04,6782.54 2852.17,6802.67 ; U5.18@2821.76,5039.87 2891.67,5039.87 v1@2902,5029.54 ; U6.7@2826.58,6560.54 2826.58,6638.54 2852.17,6664.13 2852.17,6802.67 ; U5.31@2837.04,4783.96 2838.22,4785.14 2862.41,4785.14 2887,4809.73 v1@2887,4868.54 ; U5.18@2850.04,5040.54 U5.18@2850.55,5041.05 ; U6.21@2852.04,6845.67 U6.21@2852.17,6845.54 2852.17,6802.67 ; U6.21@2852.52,6873.54 2852.52,6930.02 2864.04,6941.54 2900,6941.54 ; C21.2@2900,7030 2900,6941.54 ; U6.18@2928.95,6845.54 U6.18@2928.95,6859.26 ; U6.18@2930,6846.59 v1(2930,6926.54) ; v1@2930,6930 v1(2930,6926.54) ; U5.12@2979.25,5138.29 2979.25,5085.75 2995.46,5069.54 v1(3029,5069.54) ; U8.11@3043.19,3930.43 3199,3930.43 ; U8.2@3043.19,4160.75 3199,4160.75 ; v1@3175.77,5045.31 3181.08,5040 3231.08,5040 3231.45,5039.63 U5.63@3248.04,5039.63 ; U5.47@3176.1,4685.54 3176.1,4640 3188.56,4627.54 v1(3242.04,4627.54) ; C27.2@3199,4321 3199,4160.75 ; 3201.2,4007.2 U8.21@3316.81,4007.2 ; 3201.2,4032.8 U8.22@3316.81,4032.8 ; VT1.2@3268.04,6600.73 VT1.2@3277.24,6600.73 ; R22.1@4508,5155.54 R22.1@4508,5168.54 ; v1(4542,5665.54) v1@4544,5665.54 ; R23.1@4608,5670.54 R23.1@4615,5670.54 ; U3.30@4657,6720.54 U3.31@4657,6770.54 ; U3.31@4657.69,6770.54 U3.31@4657,6770.54 ; U3.32@4657.69,6820.54 4657,6820.54 U3.31@4657,6770.54 ; C26.2@4718,4910.54 C26.2@4718,4924.54 ; C16.2@4858,5480.54 C16.2@4858,5500.54 ; v1@4858,5569.54 v1(4858,5570.05) ; CA3.2@4917,5361.54 CA3.2@4917,5371.54 ; P3.8@5152.48,6464.54 P3.8@5153,6464.02 ; P3.6@5152.48,6563.02 P3.6@5152.48,6564.54 ; 2900,6941.54 2915,6941.54 v1(2930,6926.54) ; 3199,3930.43 3199,4160.75
  Top Layer w10: U8.18@3316.81,3930.43 3645.43,3930.43 3680,3965 3775,3965 C30.2@3825,4015 ; U3.30@4681,6720.54 U3.30@4687,6714.54
  Top Layer w19.68: v1@1004.77,6680.54 v3@1185,6680.54 ; Q2.1@1057.34,6179.54 1076.34,6160.54 1182.34,6160.54 1182.34,6343.54 ; v3(1183.34,6680) 1183.34,6511.54 C4.1@1214.34,6480.54 ; C4.1@1213.34,6467.54 1214.34,6466.54 v1(1214.34,6432.54) ; v1@1214.34,6430.54 R8.1@1214.34,6365.54 1214.34,6364.34 1263.74,6314.94 1459.94,6314.94 1496,6351.01 1496,6558.54 1508,6570.54 U1.4@1508,6759.54 ; 1378.34,6135.54 C3.1@1423.34,6135.54 ; C7.1@1424.34,5395.54 C7.1@1429.34,5390.54 ; C3.1@1424.34,6135.54 1524.34,6135.54 C1.1@1525.34,6136.54 ; BOOT1.1@1425.34,5249.54 1432.34,5256.54 C7.1@1432.34,5380.54 1429.34,5383.54 1429.34,5950.87 v1@1471,5992.54 ; BOOT1.1@1427.34,5250.54 1427.34,4797.66 1470,4755 P6.5@1470,4650 ; C3.1@1440,6113.54 1476,6077.54 v1(1476,5992.54) ; C1.1@1539.34,6135.54 C2.1@1654.34,6135.54 1727.54,6135.54 1748,6156 1748,6259.54 U4.15@1717,6290.54 ; BOOT0.1@1892,5250 1986,5344 C8.1@1986,5377 C8.1@1986,5382 ; v1(2320,6791.54) 2326.04,6791.54 2326.04,6963.54 VT2.2@2342.04,6979.54 ; VT2.2@2348.24,6990.54 2348.24,7009.73 2427.04,7088.54 2674.54,7088.54 ; 2737,6820 2737,7029 2676,7090 2677,7091 2677,7492.98 P5.4@2761,7576.98 ; v1(2908,5026.54) 2983,4951.54 v1@2983,4874.54 ; C27.2@3199,4321 3199,4454 3242.04,4497.04 v1(3242.04,4627.54) ; K1.1@3223.59,6925.54 3255,6894.13 3255,6763.54 v1(3257,6761.54) ; v1(3258,6567.54) 3258,6583.54 VT1.2@3271,6596.54 ; v1@3385,5051.81 3404,5070.81 v1@3404,5348.54 ; v1(3406,5958.54) 3433,5931.54 3433,5382.54 v1@3407,5356.54 ; v1(3755,4790.69) v1@3755,5088 ; C28.2@3825,4245 3825,4025 v1(3920,4025) C24.1@4015,4025 ; C15.2@4083,5115.54 4145,5115.54 v3(4170,5140.54) ; R24.1@4407,5155.54 R22.1@4508,5155.54 ; v1@4543,5664.54 4544,5665.54 4549,5670.54 R23.1@4608,5670.54 ; R23.1@4615,5665.54 4762.52,5665.54 v1(4858,5570.05) ; U3.30@4701,6720.54 4803,6720.54 ; 4804,6720.54 4804,6721.54 4925,6842.54 5190,6842.54 5230,6802.54 5230,6742.05 P3.4@5152.48,6664.54 ; C16.2@4858,5500.54 v1@4858,5565.54 ; v1@4858,5569.54 v1@4859,5570.54 ; C16.2@4859,5480.54 4859,5429.54 CA3.2@4917,5371.54 ; 4913,5258.54 4917,5262.54 CA3.2@4917,5361.54 ; P3.8@5152.48,6464.54 5152.48,6563.02 P3.6@5153,6563.54 ; P3.6@5152.48,6564.54 5152.48,6664.02 P3.4@5156,6667.54
  Top Layer w27.56: C26.2@4718,4910.54 4809.54,4819 5060,4819 5123,4882 P4.2@5123,4940
  Top Layer w31.5: 1182.34,6343.54 R8.1@1191.34,6352.54
  Top Layer w39.37: J1.9@163,6467.5 164.5,6467.5 221,6411 255,6411 255,6229 J1.10@247,6221 ; J1.10@213,6139.17 85.83,6139.17 54,6171 54,6957 131,7034 163,7034 163,7268 240,7345 980,7345 1008.34,7316.66 U4.25@1008.34,7112.58 ; v3(4360,5174.54) 4390.54,5144 4499,5144 R22.1@4503,5148 ; R22.1@4508,5145.54 4634.54,5145.54 CA4.2@4667,5178 ; CA4.2@4707,5189.54 4784,5189.54 4844.54,5129 4924,5129 P4.1@4925,5130 ; CA3.2@4923,5325 4923,5195.54 P4.1@4983,5135.54
  Bottom Layer w9.45: U10.4@514.34,5295.54 U10.4@533,5295.54 ; U2.25@849.99,6512.54 U2.24@869.68,6512.54 U2.23@889.36,6512.54 U2.22@909.05,6512.54 U2.21@928.73,6512.54 928.73,6672 ; U2.42@1164,6393.54 1164.95,6394.49 1164.95,6405.54 1191.95,6432.54 v1@1213,6432.54 ; U2.8@1184.64,6512.54 1185.34,6512.54 1185.34,6463.54 1213,6435.87 v1@1213,6435.54 ; 1224.01,6442.2 U2.6@1224.01,6512.54 ; Q1.1@1224.34,6151.99 Q1.1@1224.34,6160.54 ; v1(2930,6926.54) K1.1@3222.04,6925.54 ; C18.2@3147.04,5411.54 C18.2@3148,5411.54 ; K2.4@4199.6,5663.13 K2.4@4202,5665.54 ; K2.4@4202,5663.13 K2.4@4215,5663.13 ; v3@4360,5173.54 v3(4360,5174.54) ; v1@4539.6,5663.13 v1(4542,5665.54) ; U9.3@4600.86,4579.68 U9.3@4600.86,4631.54 ; U7.1@4784,5255.54 U7.1@4784,5270.04 ; P3.11@5052.48,6264.54 P3.11@5053,6264.54
  Bottom Layer w19.68: -100,5815 U11.10@11.26,5815 ; -99.17,5494.17 U11.11@12.09,5494.17 ; U10.4@533,5295.54 555,5295.54 ; C25.1@615,5035.54 615,5274.54 594,5295.54 555,5295.54 ; CA1.2@766,6146.54 CA1.2@766,6153.54 ; C31.2@800,5680 800,5550 ; 862.8,6682 862.38,6681.58 ; C6.1@935,6222.54 C6.1@936,6221.54 ; C6.1@937,6209.54 841,6113.54 806,6113.54 CA1.2@766,6153.54 ; v1(1008.34,6679.99) 1007.35,6679 v1@1004.77,6681.58 ; U4.25@1008.34,7112.58 1008.34,6685.14 v1@1004.77,6681.58 ; v1@1181.34,6160.54 Q1.1@1224.34,6160.54 ; v3(1183.34,6680) 1432.8,6680 1540.34,6787.54 v1@1545,6787.54 ; Q1.1@1233,6149.54 1233,6143.33 1267.8,6108.54 1349,6108.54 v1@1362,6121.54 ; 1427.34,5288.34 BOOT1.1@1427.34,5250.54 1427.34,5492.66 1370,5550 800,5550 ; 1427.34,5340 1829,5340 1882,5287 BOOT0.1@1882,5259 ; v1(1476,5992.54) 2076.04,5992.54 2095.04,5973.54 ; v1@1545,6788.54 v1(1545.34,6788.54) 2316,6788.54 v1@2320,6792.54 ; 2095.04,5973.5 2148,5920.54 P10.2@2297.04,5920.54 ; P10.2@2298.04,5930.54 2352.88,5985.38 3375.2,5985.38 v1@3403.52,5957.06 ; P5.4@2761,7576.98 2761,7640 2817,7696 3157,7696 3227,7626 K1.4@3227,7162 ; v1(2886.04,4868.54) v1(2982,4868.54) ; v1(2908,5026.54) 2989,5026.54 v1@3029,5066.54 ; C14.2@2933,5403 2933,5380 2977,5336 3091,5336 C18.2@3157,5402 ; v1@3030,5068.54 3030,5036 3068.09,4997.91 3138.39,4997.91 v1@3174,5033.52 ; C18.2@3147,5410 3250,5410 3257,5403 3257,5400.38 3312.09,5345.3 v1@3396.76,5345.3 ; v1@3175.39,5037.92 v1@3379.39,5037.92 ; K1.4@3225,7146.54 3240,7131.54 3240,6941.54 K1.1@3235,6936.54 ; v1@3254,4627.54 3591.84,4627.54 v1(3755,4790.69) 3920,4790.69 ; v1(3257,6761.54) 3257,6568.54 v1(3258,6567.54) ; v1@3385,5045.54 3724.52,5045.54 3761.49,5082.51 3766.52,5077.48 3766.52,5013.48 C22.1@3805,4975 ; C22.1@3819,4972 3916,4972 C20.1@3917,4973 ; v1(3920,4025) 3920,4790.69 ; K2.1@3976,5668.54 3983,5675.54 C9.1@4092,5675.54 ; C9.1@4100.4,5663.13 4199.6,5663.13 K2.4@4202,5663.13 ; v3(4170,5140.54) 4145,5115.54 C11.2@4083,5115.54 4083,4824.54 4049.16,4790.69 3920,4790.69 ; K2.4@4215,5663.54 4217,5665.54 v1(4542,5665.54) ; D2.1@4297.99,4940 4297.99,5137.54 ; v3@4361,5168 v3@4361,5174.54 ; C10.2@4388,5140.54 C10.2@4393,5140.54 ; U9.3@4601,4631.54 4601,4763.54 R25.1@4628,4790.54 4628,4804.54 CA2.2@4721,4897.54 ; v1(4858,5570.05) 5150.48,5862.54 P3.20@5157,5862.54 ; P4.1@4983,5135.54 P4.1@5038,5135.54 ; P3.11@5052,6265.54 5053,6264.54 P3.12@5152.48,6264.54 ; P3.20@5152.48,5864.54 P3.12@5152.48,6264.54 ; P3.4@5153,6664.54 5152.48,6664.02 P3.12@5152.48,6264.54 ; 555,5295.54 U11.8@555,5480.2 730.2,5480.2 800,5550 ; CA1.2@766,6153.54 CA1.2@766,6169.54 766,6181.54 819,6234.54 819,6510.2 842.34,6533.54 842.34,6661.54 862.38,6681.58 ; 862.38,6681.58 v1@1004.77,6681.58
  Bottom Layer w27.56: CA2.2@4747,4939.54 4747,4902 4830,4819 5060,4819 5125,4884 P4.2@5125,4948
  Bottom Layer w39.37: BT1.2@195,3828.83 -100,4123.83 -100,5815 -100,5980 59.17,6139.17 J1.10@213,6139.17 ; v3(4170,5140.54) C10.2@4388,5140.54 ; v3@4361,5168 C10.2@4388,5141 ; U7.1@4813,5255 4932.46,5135.54 P4.1@4983,5135.54 ; P4.1@5038,5135.54 5123,5050.54 P4.2@5123,4960.54
  other v1: 2575,4285 3175,5037.54 3380,5041.54 3755,5092 3404,5352.54 1365.34,6123.54 1170,6161.54
GPIO05: U3.15 VT2.3 | length 2598.5
  Top Layer w9.45: v1@2375,6159 2366.04,6167.96 2366.04,6883.54 2385.64,6903.13 VT2.3@2385.64,6907.86
  Bottom Layer w9.45: v1@2376,6157 2527.02,6157 2580.02,6104 4052.46,6104 v1@4151,6202.54
  other v1: 2378,6153 4153,6205.54
I2C1_SCL: R26.2 U5.58 U10.6 | length 3247.2
  Top Layer w9.45: v1(2475,4735) v1(2475,5043.46) ; v1(3191,4910) 3221.54,4940.54 U5.58@3257.04,4940.54
  Bottom Layer w9.45: U10.6@703.34,5245.54 U10.6@734.34,5245.54 R26.2@869.34,5245.54 ; v1(2475,4735) 3146.5,4735 3175,4763.5 3175,4894 v1(3191,4910) ; v1(2475,5043.46) 962.87,5043.46 918.34,5088 918.34,5211.54 R26.2@879.34,5250.54 ; R26.2@869.34,5245.54 874.34,5245.54 R26.2@879.34,5250.54 ; R26.2@869.34,5245.54 R26.2@869.34,5260.54 ; R26.2@869.34,5260.54 889.34,5260.54 R26.2@879.34,5250.54 ; R26.2@869.34,5260.54 R26.2@879.34,5250.54
I2C1_SDA: R27.2 U5.59 U10.5 | length 3411.1
  Top Layer w10: v1(2445,4770) v1(2445,5080) ; v1(3150,4910) 3200.54,4960.54 U5.59@3282.04,4960.54
  Bottom Layer w10: U10.5@734.34,5295.54 778.34,5295.54 R27.2@843.34,5360.54 ; R27.2@869.34,5375.54 908.34,5414.54 908.34,5440.54 933.34,5465.54 1024.46,5465.54 1080,5410 1080,5115 1115,5080 v1(2445,5080) ; v1(2445,4770) 2514.31,4770 2529.31,4755 3125,4755 3149.83,4779.83 v1@3149.83,4910
JNTRST: P3.3 U5.56 | length 3215.2
  Top Layer w9.45: U5.56@3274.52,4902.07 3282.34,4902.07 3282.58,4901.83 3526.3,4901.83 3591.96,4967.5 3591.96,5915.02 v1@3622.48,5945.54 ; v1(4502,5975.54) 4814,6287.54 4814,6427.54 5050.99,6664.54 P3.3@5052.48,6664.54
  Bottom Layer w9.45: v1@3623,5940.54 v1@3623,5946.54 ; v1@3623,5952.54 v1@3623,5946.54 ; v1(4502,5975.54) 4501,5975.54 4494.52,5969.06 4479.6,5969.06 4405.98,5895.43 3862.1,5895.43 3791,5966.54 3643,5966.54 v1@3623,5946.54
  other v1: 3623.48,5946.54
JTCK: P3.9 U5.49 | length 3049.7
  Top Layer w9.45: U5.49@3283.22,4764 3511.46,4764
  Top Layer w10: 3511.46,4764 3551.89,4764 3702.69,4914.79 v1@3702.69,5903.7 ; v1@4577,5935.54 5006,6364.54 P3.9@5052.48,6364.54
  Bottom Layer w10: v1@3708,5911.54 3790.55,5911.54 3845.83,5856.26 4444.72,5856.26 4500,5911.54 ; 4501,5912.54 4500,5911.54 ; v1(4579,5929.54) 4518.31,5929.54 4500.31,5911.54 4500,5911.54
  other v1: 3707.52,5908.54
JTDI: P3.5 U5.50 | length 3206.2
  Top Layer w9.45: U5.50@3274.52,4783.96 3497.96,4783.96 ; 3498,4784 3544,4784 3679.52,4919.52 v1(3679.52,5938.54) ; v1@4490,5943.54 4520,5943.54 4845.55,6269.09 4845.55,6357.09 P3.5@5043.5,6555.04
  Bottom Layer w9.45: v1@3681,5942.54 3787.45,5942.54 3854,5875.98 4425.45,5875.98 v1@4488,5938.54 ; v1@4491,5938.54 v1@4488,5938.54 ; v1(4491,5941.54) v1@4488,5938.54
JTDO: P3.13 U5.55 | length 2865.2
  Top Layer w9.45: U5.55@3274.52,4882.39 3540.85,4882.39 3629.55,4971.09 3629.55,4988.54
  Top Layer w10: v1(3619.48,5851.54) 3629.28,5841.74 3629.28,4988.81 ; v1(4562,5865.54) 4861,6164.54 P3.13@5052.48,6164.54
  Bottom Layer w10: v1@3621,5849.54 3656,5814.54 4507.8,5814.54 v1@4559.8,5866.54
JTMS: P3.7 U5.46 | length 3269.2
  Top Layer w9.45: U5.46@3157.04,4695.54 3157.59,4696.09 3157.59,4726.19 3170.94,4739.54 3555.32,4739.54 3725.38,4909.59 3725.38,4954.54 ; 3725.38,4953.39 3725.38,4954.54 ; v1@3725.38,5875.39 3725.38,4954.54 ; v1@4527,5895.54 4527,5922.54 5052.48,6448.02 5052.48,6460.54 P3.7@5057,6460.54
  Bottom Layer w9.45: v1@3728,5882.54 3791.66,5882.54 3837.66,5836.54 4473,5836.54 v1(4527,5890.54)
  other v1: 3730.48,5879.54
LPG: R15.2 U2.13 U4.30 U5.57 | length 5594.3
  Top Layer w9.45: v1(608,6824) 1213,6824 v1(1214,6823) ; v1(1086.21,6568.54) 1094.34,6560.41 R15.2@1094.34,6470.54 ; U5.57@3274.52,4921.76 3518.72,4921.76 3572.51,4975.55 3572.51,6341.02 v1(3558,6355.54)
  Bottom Layer w9.45: v1(608,6824) 608,7100 U4.30@615,7107 ; U2.13@1086.21,6512.54 v1(1086.21,6568.54) 1126,6608.32 1126,6735 v1(1214,6823) ; 1129.52,6612.06 2381.48,6612.06 2644.52,6349.02 v1@3551.48,6349.02
NetBT1_1: BT1.1 D4.1 | length 1114.6
  Bottom Layer w9.45: BT1.1@195,4643.8 195,4825 258.9,4888.9 1003.9,4888.9 1019.34,4904.34 D4.1@1019.34,4960.6 D4.1@1019.34,4980.54
NetC1_2: C1.2 R1.2 U2.1 | length 518.5
  Top Layer w9.45: C1.2@1539.34,6225.54 1539.34,6339.54 1539.34,6351.54 R1.2@1554.34,6366.54 ; v1(1554.34,6339.54) R1.2@1554.34,6366.54 ; R1.2@1554.34,6385.54 R1.2@1554.34,6366.54
  Bottom Layer w9.45: U2.1@1322.43,6512.54 1322.43,6475.44 1338.34,6459.54 1434.34,6459.54 v1(1554.34,6339.54)
NetC2_2: C2.2 R2.2 U2.3 | length 679.9
  Top Layer w9.45: v1(1612.34,6383.54) 1614.34,6385.54 R2.2@1669.34,6385.54 1669.34,6305.54 1654.34,6290.54 C2.2@1654.34,6225.54
  Bottom Layer w9.45: U2.3@1283.06,6512.54 1283.06,6558.54 1294.03,6569.5 ; 1295,6569.54 1353.34,6569.54 1539.34,6383.54 v1(1612.34,6383.54)
NetC3_2: C3.2 R3.2 U2.4 | length 675
  Top Layer w9.45: v1(1379.34,6259.54) 1380.34,6258.54 1424.34,6258.54 C3.2@1424.34,6225.54 ; v1(1379.34,6385.54) 1409.34,6385.54 ; v1(1399.34,6584.54) 1399.34,6395.54 1409.34,6385.54 ; R3.2@1439.34,6385.54 1409.34,6385.54
  Bottom Layer w9.45: U2.4@1263.38,6512.54 1263.38,6577.36 1275.01,6588.98 1394.89,6588.98 v1(1399.34,6584.54) ; v1(1379.34,6259.54) v1(1379.34,6385.54)
NetC18_1: C18.1 U5.6 Y1.1 | length 564.5
  Top Layer w9.45: U5.6@3097.36,5138.29 3097.36,5535.85 3097.36,5537.36 Y1.1@3102,5542
  Top Layer w10: Y1.1@3097.36,5535.85 Y1.1@3102.04,5540.54
  Bottom Layer w10: C18.1@3057.04,5411.54 3057.04,5494.04 Y1.1@3099,5536 ; Y1.1@3101,5538 Y1.1@3099,5536 ; Y1.1@3102.04,5540.54 3102.04,5536 Y1.1@3099,5536
NetC19_2: C19.2 U5.5 Y1.2 | length 613.6
  Top Layer w9.45: U5.5@3117.04,5140.54 3117,5140.57 3117,5355.5 Y1.2@3302.04,5540.54
  Bottom Layer w10: Y1.2@3302,5534 3337.04,5498.96 C19.2@3337.04,5411.54